# Altium PCB PicoBerry_V1.0_WithoutCM4.PcbDoc
Units mm, origin at the board's own origin, x right, y up, seen from the top; angles counter-clockwise.
Board outline 70 x 20 mm, 2 copper layers (L1 [TOP], L2 [BOT]), stack 1.57 mm thick; 35 components, 42 nets, 212 pads, 119 vias.
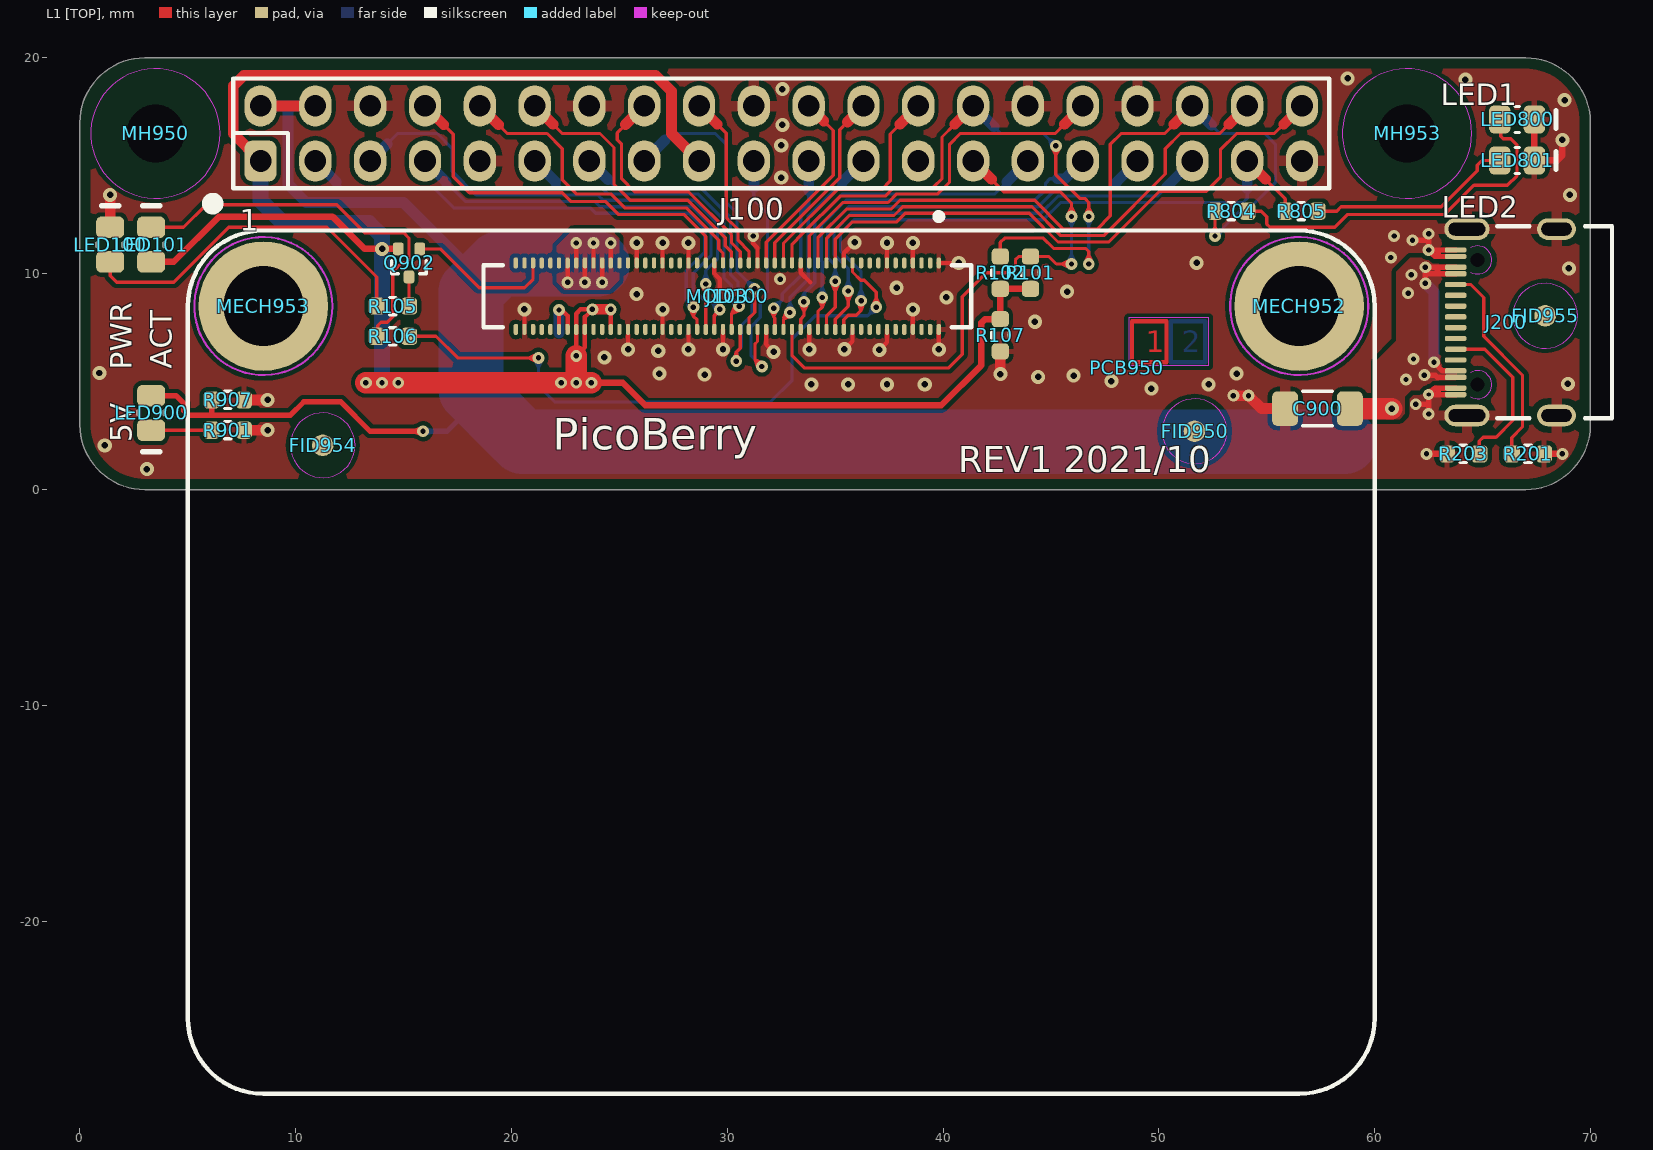
[diagram p0: L1 [TOP] view]
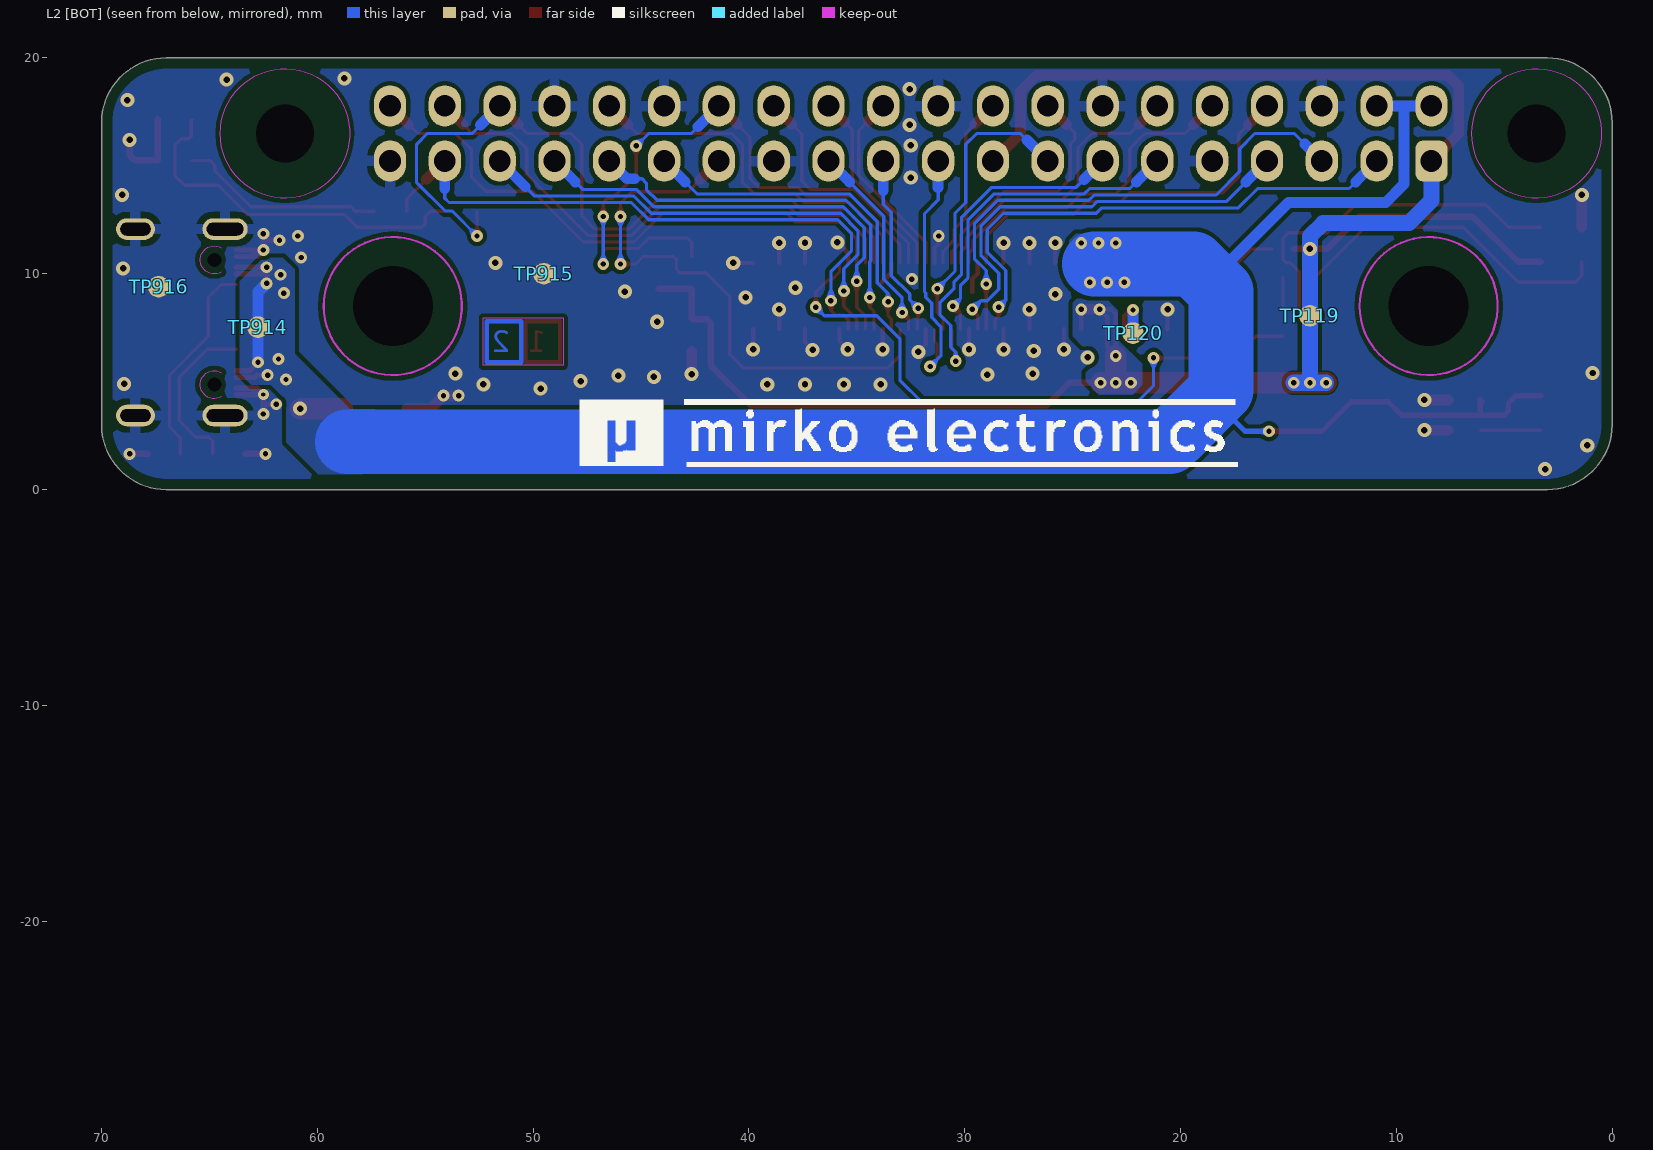
[diagram p1: L2 [BOT] view, seen from below]
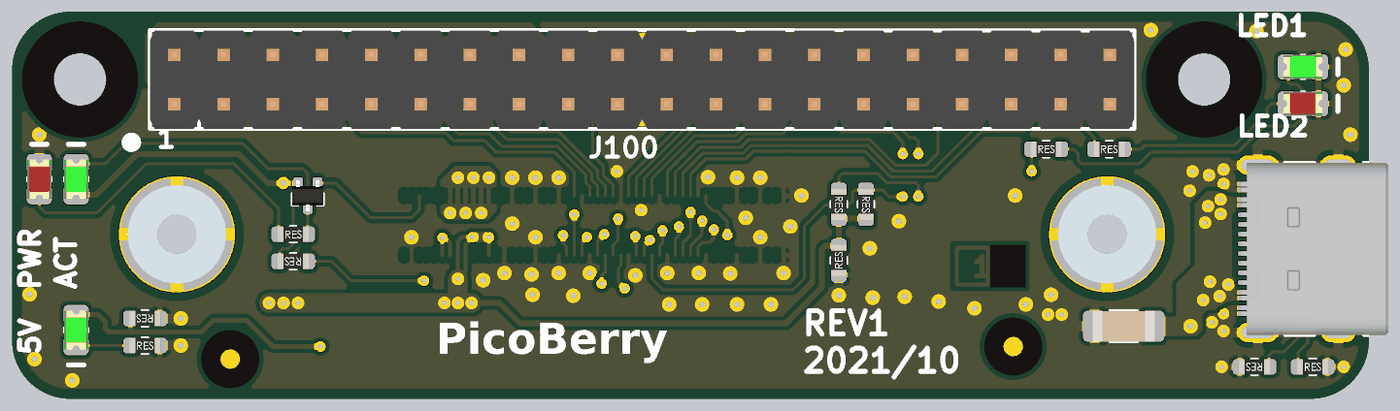
[diagram p2: 3D render of the assembled board from above, using the file's embedded part models]

## Layer stack, top to bottom
Solder [TOP]: solder mask 0.01, Solder Resist, Dk 3.5
L1 [TOP]: signal copper 0.035
Core: dielectric 1.5, FR-4, Dk 4.05
L2 [BOT]: signal copper 0.035
Solder [BOT]: solder mask 0.01, Solder Resist, Dk 3.5

## Board outline
0,3 0,17 cw(c3,17) 3,20 67,20 cw(c67,17) 70,17 70,3 cw(c67,3) 67,0 3,0 cw(c3,3)

## Design rules (kind name [scope] priority, off if disabled: settings)
BoardOutlineClearance BoardOutlineClearance_Components [InComponentClass('ComponentsNearEdge')] p1: gap=0 ignorepadtopadclearanceinfootprint=FALSE
BoardOutlineClearance BoardOutlineClearance_Silk [IsText] p2: gap=0 ignorepadtopadclearanceinfootprint=FALSE
BoardOutlineClearance [All] p3: gap=0.5 ignorepadtopadclearanceinfootprint=FALSE
Clearance Clearance_PCB950 [InComponent('PCB950') vs InComponent('PCB950')] p1: gap=0 ignorepadtopadclearanceinfootprint=FALSE
Clearance Clearance_polygon [InPolygon] p2: gap=0.2 ignorepadtopadclearanceinfootprint=FALSE
Clearance [All] p3: gap=0.15 ignorepadtopadclearanceinfootprint=FALSE
HoleSize [All] p1: absolutevalues=TRUE maxlimit=5 minlimit=0.2 maxpercent=80.000 minpercent=20.000
HoleToHoleClearance [All] p1: gap=0.4 allowstackedmicrovias=TRUE
MatchedLengths MatchedLengths_DiffPair [InDifferentialPairClass('All Differential Pairs')] p1: tolerance=0.1 checknetsindiffpair=TRUE checkdiffpairvsdiffpair=FALSE checkxsignals=FALSE checkothers=FALSE
MatchedLengths MatchedLengths_HDMI0 [InDifferentialPairClass('HDMI0')] p2: tolerance=1 checknetsindiffpair=FALSE checkdiffpairvsdiffpair=TRUE checkxsignals=TRUE checkothers=TRUE
MatchedLengths MatchedLengths_HDMI1 [InDifferentialPairClass('HDMI1')] p3: tolerance=1 checknetsindiffpair=FALSE checkdiffpairvsdiffpair=TRUE checkxsignals=TRUE checkothers=TRUE
MatchedLengths MatchedLengths_MIPI_CAM0 [InDifferentialPairClass('MIPI_CAM0')] p4: tolerance=1 checknetsindiffpair=FALSE checkdiffpairvsdiffpair=TRUE checkxsignals=TRUE checkothers=TRUE // CAM
MatchedLengths MatchedLengths_MIPI_CAM1 [InDifferentialPairClass('MIPI_CAM1')] p5: tolerance=1 checknetsindiffpair=FALSE checkdiffpairvsdiffpair=TRUE checkxsignals=TRUE checkothers=TRUE // CAM
MatchedLengths MatchedLengths_MIPI_DSI0 [InDifferentialPairClass('MIPI_DSI0')] p6: tolerance=1 checknetsindiffpair=FALSE checkdiffpairvsdiffpair=TRUE checkxsignals=TRUE checkothers=TRUE // CAM
MatchedLengths MatchedLengths_MIPI_DSI1 [InDifferentialPairClass('MIPI_DSI1')] p7: tolerance=1 checknetsindiffpair=FALSE checkdiffpairvsdiffpair=TRUE checkxsignals=TRUE checkothers=TRUE // CAM
MatchedLengths MatchedLengths_PCIe [InDifferentialPairClass('PCIe')] p8: tolerance=1 checknetsindiffpair=FALSE checkdiffpairvsdiffpair=TRUE checkxsignals=TRUE checkothers=TRUE // CAM
MinimumAnnularRing [All] p1: minimumring=0.1
MinimumSolderMaskSliver [All] p1: minsoldermaskwidth=0.05
PlaneClearance [All] p1: clearance=0.5
PlaneConnect [All] p1: planeconnectstyle=Relief reliefexpansion=0.5 reliefentries=4 reliefconductorwidth=0.5 reliefairgap=0.3
PolygonConnect PolygonConnect_via [IsVia] p1: connectstyle=Direct reliefconductorwidth=0.254 reliefentries=4 polygonreliefangle="90 Angle" airgapwidth=0.254
PolygonConnect [All] p2: thpad.connectstyle=Relief thpad.reliefconductorwidth=0.5 thpad.reliefentries=4 thpad.polygonreliefangle="90 Angle" thpad.airgapwidth=0.3 smdpad.connectstyle=Relief smdpad.reliefconductorwidth=0.25 smdpad.reliefentries=4 smdpad.polygonreliefangle="90 Angle" smdpad.airgapwidth=0.2 via.connectstyle=Direct via.reliefconductorwidth=0.2 via.reliefentries=4 via.polygonreliefangle="90 Angle" via.airgapwidth=0.3
RoutingVias [All] p1: holewidth=0.3 width=0.65 viastyle="Through Hole" minholewidth=0.2 minwidth=0.45 maxholewidth=0.4 maxwidth=0.8
SilkToSilkClearance [All] p1: silktosilkclearance=0.15
SilkToSolderMaskClearance [IsPad] p1: minsilkscreentomaskgap=0.1 clearancetoexposedcopper=TRUE
SolderMaskExpansion SolderMaskExpansion_via [IsVia] p1: expansion=-10 istentingtop=FALSE
SolderMaskExpansion [All] p2: expansion=0.05 istentingtop=FALSE
Width [All] p1: maxlimit=4 minlimit=0.1 preferedwidth=0.2
23 further rules are at their usual default settings.

## Classes and differential pairs
component class ComponentsNearEdge: J200 MOD100

## Components (designator, comment, footprint, x,y, rotation, side; value= is the part's Value field where it differs from the comment)
C900 "100uF/6V3" CAP_1206_R 57.35,3.75 r0 top
FID950 "Fiducial" PCB_FID_RND_100x300 51.65,2.7 r90 top
FID954 "Fiducial" PCB_FID_RND_100x300 11.25,2.05 r0 top
FID955 "Fiducial" PCB_FID_RND_100x300 67.9,8.05 r0 top
J100 "40pin (2x20pin)" CON_HDR_P254_2X20M_STR 32.5,16.5 r0 top locked
J103 "Mezzanine, 100pin, 3.0mm" PCB_BLANK_COMP_SMD 30,8.95 r0 top locked
J200 "U262-161N-4BVC11" CON_XKB_U262-161N-4BVC11 67.35,7.75 r90 top locked
LED100 "Red" LED_0805_RED_R 1.4,11.35 r270 top
LED101 "Green" LED_0805_GRN_R 3.3,11.35 r270 top
LED800 "Green" LED_0805_GRN_R 66.6,17.15 r180 top
LED801 "Red" LED_0805_RED_R 66.6,15.25 r180 top
LED900 "Green" LED_0805_GRN_R 3.3,3.55 r90 top
MECH952 "M2.5, L = 3.0mm" PCB_WRT_9774030151 56.5,8.5 r180 top locked value="M2.5, L = 3.0mm"
MECH953 "M2.5, L = 3.0mm" PCB_WRT_9774030151 8.5,8.5 r180 top locked value="M2.5, L = 3.0mm"
MH950 "H270_C600" PCB_MH_H270_C600 3.5,16.5 r90 top locked
MH953 "H270_C600" PCB_MH_H270_C600 61.5,16.5 r90 top locked
MOD100 "RPi CM4 Module" MOD_RPI_CM4_P40_C300_CON1 32.5,-8 r90 top locked
PCB950 "PCB_LAYER_STACKUP" PCB_STACKUP-2L_A1 48.5,5.65 r0 top
Q902 "DTA143ZE" PKG_SOT523_SC75_SOT416_P100_R 15.25,10.5 r180 top
R101 "2k" RES_0603_R 44.05,10.05 r270 top
R102 "2k" RES_0603_R 42.65,10.05 r270 top
R105 "2k" RES_0603_R 14.5,8.5 r0 top
R106 "15k" RES_0603_R 14.5,7.1 r180 top
R107 "2k" RES_0603_R 42.65,7.15 r90 top
R201 "5k1" RES_0603_R 67.1,1.65 r0 top
R203 "5k1" RES_0603_R 64.1,1.65 r180 top
R804 "15k" RES_0603_R 53.35,12.9 r0 top
R805 "2k" RES_0603_R 56.6,12.9 r0 top
R901 "15k" RES_0603_R 6.85,2.75 r0 top
R907 "2k" RES_0603_R 6.85,4.15 r180 top
TP119 "ICT" PCB_TP_ICT_100 14,8.05 r180 bottom
TP120 "ICT" PCB_TP_ICT_100 22.2,7.25 r180 bottom
TP914 "ICT" PCB_TP_ICT_100 62.75,7.525 r180 bottom
TP915 "ICT" PCB_TP_ICT_100 49.5,10 r180 bottom
TP916 "ICT" PCB_TP_ICT_100 67.35,9.4 r180 bottom

## Footprints (in the part's own frame and the unit in brackets; to place one, negate y for a bottom-side part, rotate by r counter-clockwise, add the part's x,y. Pads: shape width x height; smd on the part's side, far side on the other; paste and mask are expansions set on the pad)
CAP_1206_R [mm]
  rrect40% 1.2x1.6 smd paste+0: 1(-1.5,0)
  rrect40% 1.2x1.6 smd: 2(1.5,0)
  silkscreen extent -0.7,-0.8 0.7,0.8, body extent -1.6,-0.8 1.6,0.8, height 0.79
CON_HDR_P254_2X20M_STR [mm]
  rrect50% 1.5x1.9 hole 1: 1(-24.13,-1.275)
  oval 1.5x1.9 hole 1: 2(-24.13,1.275) 3(-21.59,-1.275) 4(-21.59,1.275) 5(-19.05,-1.275) 6(-19.05,1.275) 7(-16.51,-1.275) 8(-16.51,1.275) 9(-13.97,-1.275) 10(-13.97,1.275) 11(-11.43,-1.275) 12(-11.43,1.275) 13(-8.89,-1.275) 14(-8.89,1.275) 15(-6.35,-1.275) 16(-6.35,1.275) 17(-3.81,-1.275) 18(-3.81,1.275) 19(-1.27,-1.275) 20(-1.27,1.275) 21(1.27,-1.275) 22(1.27,1.275) 23(3.81,-1.275) 24(3.81,1.275) 25(6.35,-1.275) 26(6.35,1.275) 27(8.89,-1.275) 28(8.89,1.275) 29(11.43,-1.275) 30(11.43,1.275) 31(13.97,-1.275) 32(13.97,1.275) 33(16.51,-1.275) 34(16.51,1.275) 35(19.05,-1.275) 36(19.05,1.275) 37(21.59,-1.275) 38(21.59,1.275) 39(24.13,-1.275) 40(24.13,1.275)
  silkscreen extent -26.6,-3.5 25.4,2.55, body extent -25.4,-2.54 25.4,2.54, height 8.59
CON_XKB_U262-161N-4BVC11 [mm]
  rrect75% 0.25x1 smd: A1(-3.35,3.6) A4(-2.55,3.6) A5(-1.25,3.6) A6(-0.25,3.6) A7(0.25,3.6) A8(1.25,3.6) A9(2.55,3.6) A12(3.35,3.6) B1(3.05,3.6) B4(2.25,3.6) B5(1.75,3.6) B6(0.75,3.6) B7(-0.75,3.6) B8(-1.75,3.6) B9(-2.25,3.6) B12(-3.05,3.6)
  round 0 hole 0.65 unplated mask+0.1: MH1(-2.89,2.575) MH2(2.89,2.575)
  rrect100% 1x1.8 hole 1.4 slot 0.6 at 0 deg: SH(-4.32,-1.075) SH(4.32,-1.075)
  rrect100% 1x2.1 hole 1.7 slot 0.6 at 0 deg: SH(-4.32,3.075) SH(4.32,3.075)
  silkscreen extent -4.45,-3.65 4.45,1.67, body extent -4.45,-3.66 4.45,3.9, height 3.3
LED_0805_GRN_R [mm]
  rrect50% 1x1.3 smd: 1(-0.8,0) 2(0.8,0)
  silkscreen extent -1.8,-0.6 0.1,0.6, body extent -1.01,-0.63 1.01,0.62, height 1.1
LED_0805_RED_R [mm]
  rrect50% 1x1.3 smd: 1(-0.8,0) 2(0.8,0)
  silkscreen extent -1.8,-0.6 0.1,0.6, body extent -1.01,-0.63 1.01,0.62, height 1.1
MOD_RPI_CM4_P40_C300_CON1 [mm]
  rrect75% 0.5x0.2 smd: 1(18.5,-7.3) 2(15.42,-7.3) 3(18.5,-6.9) 4(15.42,-6.9) 5(18.5,-6.5) 6(15.42,-6.5) 7(18.5,-6.1) 8(15.42,-6.1) 9(18.5,-5.7) 10(15.42,-5.7) 11(18.5,-5.3) 12(15.42,-5.3) 13(18.5,-4.9) 14(15.42,-4.9) 15(18.5,-4.5) 16(15.42,-4.5) 17(18.5,-4.1) 18(15.42,-4.1) 19(18.5,-3.7) 20(15.42,-3.7) 21(18.5,-3.3) 22(15.42,-3.3) 23(18.5,-2.9) 24(15.42,-2.9) 25(18.5,-2.5) 26(15.42,-2.5) 27(18.5,-2.1) 28(15.42,-2.1) 29(18.5,-1.7) 30(15.42,-1.7) 31(18.5,-1.3) 32(15.42,-1.3) 33(18.5,-0.9) 34(15.42,-0.9) 35(18.5,-0.5) 36(15.42,-0.5) 37(18.5,-0.1) 38(15.42,-0.1) 39(18.5,0.3) 40(15.42,0.3) 41(18.5,0.7) 42(15.42,0.7) 43(18.5,1.1) 44(15.42,1.1) 45(18.5,1.5) 46(15.42,1.5) 47(18.5,1.9) 48(15.42,1.9) 49(18.5,2.3) 50(15.42,2.3) 51(18.5,2.7) 52(15.42,2.7) 53(18.5,3.1) 54(15.42,3.1) 55(18.5,3.5) 56(15.42,3.5) 57(18.5,3.9) 58(15.42,3.9) 59(18.5,4.3) 60(15.42,4.3) 61(18.5,4.7) 62(15.42,4.7) 63(18.5,5.1) 64(15.42,5.1) 65(18.5,5.5) 66(15.42,5.5) 67(18.5,5.9) 68(15.42,5.9) 69(18.5,6.3) 70(15.42,6.3) 71(18.5,6.7) 72(15.42,6.7) 73(18.5,7.1) 74(15.42,7.1) 75(18.5,7.5) 76(15.42,7.5) 77(18.5,7.9) 78(15.42,7.9) 79(18.5,8.3) 80(15.42,8.3) 81(18.5,8.7) 82(15.42,8.7) 83(18.5,9.1) 84(15.42,9.1) 85(18.5,9.5) 86(15.42,9.5) 87(18.5,9.9) 88(15.42,9.9) 89(18.5,10.3) 90(15.42,10.3) 91(18.5,10.7) 92(15.42,10.7) 93(18.5,11.1) 94(15.42,11.1) 95(18.5,11.5) 96(15.42,11.5) 97(18.5,11.9) 98(15.42,11.9) 99(18.5,12.3) 100(15.42,12.3)
  silkscreen extent -20,-27.5 20.8,27.5, body extent 15.27,-8.8 18.65,13.8, height 2.9
PCB_BLANK_COMP_SMD [mm]
  round 0.1 on Mech16: SMD(0,0)
PCB_FID_RND_100x300 [mm]
  round 1 smd paste-10 mask+1: 0(0,0)
  L1 [TOP] pour cut-out: -1.6,0 -1.478,-0.612 -1.131,-1.131 -0.612,-1.478 0,-1.6 0,-1.6 0.612,-1.478 1.131,-1.131 1.478,-0.612 1.6,0 1.6,0 1.478,0.612 1.131,1.131 0.612,1.478 0,1.6 0,1.6 -0.612,1.478 -1.131,1.131 -1.478,0.612 -1.6,0
  L1 [TOP] keep-out circle w0.05: c0,0 r1.5
PCB_MH_H270_C600 [mm]
  round 0 hole 2.7 unplated mask+3: 0(0,0)
  Keep-Out Layer circle w0.05: c0,0 r3
PCB_STACKUP-2L_A1 [mm]
  L1 [TOP] pour cut-out: 0,2.4 3.9,2.4 3.9,0 0,0
  L1 [TOP] lines w0.2: 0.25,0.25 1.85,0.25 1.85,2.15 0.25,2.15 0.25,0.25
  L2 [BOT] pour cut-out: 3.9,2.4 0,2.4 0,0 3.9,0
  L2 [BOT] lines w0.2: 2.05,0.25 3.65,0.25 3.65,2.15 2.05,2.15 2.05,0.25
  Keep-Out Layer region: 0.1,0.1 3.8,0.1 3.8,2.3 0.1,2.3
PCB_TP_ICT_100 [mm] "testpoint"
  round 1 smd paste-10: 1(0,0)
PCB_WRT_9774030151 [mm] "SMT Steel Spacer with internal Thread M2.5, height 3mm"
  round 6 / inner round 0 / far side round 0 hole 3.7 unplated: 1(0,0)
  body extent -2.55,-2.55 2.55,2.55, height 3
PKG_SOT523_SC75_SOT416_P100_R [mm]
  rrect50% 0.5x0.6 smd: 1(-0.5,-0.65) 2(0.5,-0.65) 3(0,0.65)
  silkscreen extent -0.8,-0.1 0.8,0.5, body extent -0.8,-0.79 0.8,0.81, height 0.79
RES_0603_R [mm]
  rrect50% 0.75x0.8 smd: 1(-0.75,0) 2(0.75,0)
  silkscreen extent -0.15,-0.4 0.15,0.4, body extent -0.8,-0.4 0.8,0.4, height 0.3

## Part data
C900: library part CAP-0025, "Capacitor; MLCC; GENERIC; TBD; TBD; TBD; TBD; SMD; 1206 (3216);", Manufacturer=GENERIC, Package (Case)="1206 (3216)", Component Subtype=MLCC, Component Type=Capacitor, Mounting Type=SMD, MPN=GENERIC, Supplier=?
FID950 FID954 FID955: library part PCB_FID_RND, "PCB Marking; Fiducial; Round;", Component Subtype=-, Component Type=Fiducial, Mounting Type=-, Supplier=?
J100: library part CON_2X20_ROW, "Connector; 2 Row;", Manufacturer=GENERIC, Component Subtype="Pin Header", Component Type=Connector, Mounting Type=THT, MPN=GENERIC, Supplier=?
J103: library part BOM_CON, "BOM list; Connector;", Manufacturer=Hirose, MPN=DF40HC(3.0)-100DS-0.4V, Package (Case)=SMD, Component Subtype=Microminiature, Component Type=Connector, Mounting Type=SMD, Supplier=?
J200: library part CON_USB_TYPE_C_16P, "Connector; USB 3.1 Type C; Receptacle; 24-pin; USB 2.0 Only;", Manufacturer="XKB Connectivity", Package (Case)=SMD, Component Subtype=USB-C, Component Type=Connector, Mounting Type=SMD, MPN=U262-161N-4BVC11, Supplier=?
LED100 LED801: library part DIO_LED_RED, "Diode; LED; Red;", Manufacturer="Foshan NationStar Optoelectronics", MPN=NCD0805R1, Package (Case)="0805 (2012)", Component Subtype="LED Diode", Component Type=LED, Mounting Type=SMD, Supplier=LCSC
LED101 LED800 LED900: library part DIO_LED_GRN, "Diode; LED; Green;", Manufacturer="Foshan NationStar Optoelectronics", MPN=NCD0805G1, Package (Case)="0805 (2012)", Component Subtype="LED Diode", Component Type=LED, Mounting Type=SMD, Supplier=LCSC
MECH952 MECH953: library part PCB_MECH_WRT_WA-SMSI, "PCB; Mechanical; SMT Steel Spacer; M2.5;", Manufacturer="Wurth Elektronik", MPN="977 403 015 1", Package (Case)=SMD, Component Subtype="SMD Spacer", Component Type="Spacer (Standoff)", Mounting Type=SMD, Supplier="Wurth Elektronik"
MH950 MH953: library part PCB_MECH_MH, "PCB Marking; Mounting hole;", Component Subtype=-, Component Type="Mounting Hole", Mounting Type=-, Supplier=?
MOD100: library part MOD_RPI_CM4_VAR3_CON1, "PCB Module; RPi Compute Module 4; Connector #1 (pins 1-100)", Manufacturer="Raspberry Pi Foundation", MPN="CM4 Module", Component Subtype="Raspberry Pi CM4", Component Type="PCB Module", Mounting Type=-, Supplier=?
Q902: library part TRA_BJT_PNP_DIG_ONS_DTA143ZE, "Transistor; BJT; PNP; Digital (Biased);", Manufacturer="On Semiconductor", MPN=DTA143ZET1G, Component Type=Transistor, Mounting Type=SMD
R101 R102 R105 R107 R805 R907: library part RES-0033, "Resistor; Thick Film; 2k2; 1%; 100mW; 100PPM; 75V; Standard; SMD; 0603 (1608);", Manufacturer="Yageo Corporation", MPN=TBD, Package (Case)="0603 (1608)", Component Subtype="Thick Film", Component Type=Resistor, Mounting Type=SMD, Supplier=?
R106 R804 R901: library part RES-0043, "Resistor; Thick Film; 15k; 1%; 100mW; 100PPM; 75V; Standard; SMD; 0603 (1608);", Manufacturer="Yageo Corporation", MPN=TBD, Package (Case)="0603 (1608)", Component Subtype="Thick Film", Component Type=Resistor, Mounting Type=SMD, Supplier=?
R201 R203: library part RES-0043, "Resistor; Thick Film; 5k1; 1%; 100mW; 100PPM; 75V; Standard; SMD; 0603 (1608);", Manufacturer="Yageo Corporation", MPN=TBD, Package (Case)="0603 (1608)", Component Subtype="Thick Film", Component Type=Resistor, Mounting Type=SMD, Supplier=?
TP119 TP120 TP914 TP915 TP916: library part PCB_TP_ICT, "Test Point (ICT)", Manufacturer=-, Component Type="Testpoint (for ICT)", Mounting Type="Non component", MPN=-, Specification="Testpoint (for ICT), SMD pad"
PCB950: Component Subtype=-, Component Type="PCB Marking", Mounting Type=-, Supplier=?

## Via types
v1: diameter 0.55, hole 0.25, L1 [TOP] to L2 [BOT], 60 vias
v2: diameter 0.65, hole 0.3, L1 [TOP] to L2 [BOT], 58 vias
v3: diameter 0.5, hole 0.2, L1 [TOP] to L2 [BOT], 1 vias

## Nets (pads, with @x,y where several pads share a name; then routed paths per layer and width w, separated by ;. In a path a pad name is that pad's centre, name@x,y a point inside that pad or via, vN(x,y) a via of type N, cw(c..) or ccw(c..) an arc to the next point about the centre after c; other vN are vias at no path point)
+1V8: MOD100.88 MOD100.90 TP120.1 | length 3.1
  L1 [TOP] w0.2: MOD100.90 v1(22.2,8.32) 22.33,8.32 22.6,8.05 MOD100.88
  L2 [BOT] w0.5: TP120.1 v1(22.2,8.32)
+3V3: J100.1 J100.17 LED101.2 MOD100.78 MOD100.84 MOD100.86 Q902.2 R101.2 R102.2 R107.2 TP119.1 | length 101.8
  L1 [TOP] w0.2: MOD100.78 v1(24.6,8.345) ; v1(23,6.195) 23.4,6.595 MOD100.84 23.4,8 v1(23.75,8.35) 23.2,8.35 23,8.15 MOD100.86 v1(23,6.195)
  L1 [TOP] w0.3: LED101.2 4.35,10.55 6.45,12.65 11.7,12.65 13.2,11.15 v2(14,11.15) Q902.2 ; v1(23.7,4.95) 25.15,4.95 26.2,3.9 39.919,3.9 41.771,5.752 41.771,7.721 41.95,7.9 R107.2 R102.2 R101.2 R101.2@44.189,9.3
  L1 [TOP] w0.5: J100.1 7.1,16.495 7.1,18.7 7.6,19.2 26.67,19.2 27.41,18.46 27.41,16.505 J100.17 ; v1(23.75,8.35) 24.595,8.35 v1(24.6,8.345)
  L1 [TOP] w1: v1(13.25,4.95) v1(22.3,4.95) v1(23,4.95) ; v1(23,6.195) v1(23,4.95) ; v1(23.7,4.95) v1(23,4.95)
  L2 [BOT] w0.75: J100.1 8.37,13.39 9.415,12.345 13.392,12.345 14,11.736 TP119.1 v1(14,4.95) ; v1(13.25,4.95) v1(14,4.95) ; v1(14.75,4.95) v1(14,4.95)
+5V: C900.2 J100.2 J100.4 J200.A4 J200.A9 J200.B4 J200.B9 LED900.2 MOD100.77 MOD100.79 MOD100.81 MOD100.83 MOD100.85 MOD100.87 R907.2 TP914.1 | length 108.7
  L1 [TOP] w0.2: v1(22.6,9.6) MOD100.87 ; MOD100.85 v1(23,11.425) v1@23,11.45 ; v1(23.4,9.6) MOD100.83 ; MOD100.81 v1(23.8,11.425) v1@23.8,11.45 ; v1(24.2,9.6) MOD100.79 ; MOD100.77 v1(24.6,11.425) v1@24.6,11.45
  L1 [TOP] w0.25: LED900.2 4.45,4.35 4.8,4 4.8,3.65 5,3.45 6.1,3.45 ; R907.2 6.1,3.45 ; v1(15.9,2.7) 13.45,2.7 12.088,4.062 10.371,4.062 9.759,3.45 6.1,3.45 ; v1(62.3,5.3) 62.8,5.3 62.9,5.2 J200.A4 ; v1(62.35,9.55) 62.35,9.925 ; v1(62.75,5.9) 63.15,5.5 J200.B9 ; 62.9,10 62.9,10.3 ; J200.B4 62.425,10 62.35,9.925 ; J200.A9 v1(62.35,10.3) 62.35,9.925
  L1 [TOP] w0.3: R907.2@6.05,4.1 R907.2
  L1 [TOP] w0.5: J100.2 J100.4
  L1 [TOP] w1: C900.2 v2(60.8,3.75)
  L2 [BOT] w0.25: v1(15.9,2.7) 17,2.7 18.126,3.826 18.126,4.599 ; 24.6,10.55 v1(24.6,11.425)
  L2 [BOT] w0.5: J100.2 9.64,17.775 ; J100.4 9.64,17.775 ; 18.45,9.85 14.996,13.304 10.491,13.304 9.64,14.155 9.64,17.775 ; v1(62.35,9.55) 62.75,9.15 v1(62.75,5.9)
  L2 [BOT] w3: 24,10.45 23.4,10.45 19.4,10.45 18.126,9.176 18.126,4.599 20.1,2.625 20.513,2.212 58.6,2.212
  other v1: 61.45,5.1 61.8,6.05 61.55,9.1 61.7,9.95
CM_GPIO2: J100.3 MOD100.58 | length 24.5
  L1 [TOP] w0.15: v1(28.425,8.45) 28.425,8.039 28.6,7.864 MOD100.58
  L2 [BOT] w0.15: 11.878,14.258 12.185,13.95 16.425,13.95 17.325,13.05 23.65,13.05 23.9,12.8 28.2,12.8 28.95,12.05 28.95,11 28.1,10.15 28.1,8.775 v1(28.425,8.45)
  L2 [BOT] w0.5: J100.3 11.878,14.258
CM_GPIO3: J100.5 MOD100.56 | length 24.1
  L1 [TOP] w0.15: MOD100.56 v1(29,9.525)
  L2 [BOT] w0.15: 14.238,16.013 14.725,16.5 16.55,16.5 17.25,15.8 17.25,14.75 18.35,13.65 24,13.65 24.25,13.4 28.474,13.4 29.55,12.324 29.55,10.7 29,10.15 v1(29,9.525)
  L2 [BOT] w0.5: J100.5 14.238,16.013
CM_GPIO4: J100.7 MOD100.54 | length 20.5
  L1 [TOP] w0.15: J100.7@15.99,15.19 J100.7 ; MOD100.54 29.4,8.062 29.65,8.312 v1(29.65,8.35)
  L2 [BOT] w0.15: 16.958,14.258 17.865,13.35 23.85,13.35 24.1,13.1 28.35,13.1 29.25,12.2 29.25,10.85 28.425,10.025 28.425,9.275 28.95,8.75 29.25,8.75 v1(29.65,8.35)
  L2 [BOT] w0.5: J100.7 16.958,14.258
CM_GPIO5: J100.29 MOD100.34 | length 16.3
  L1 [TOP] w0.15: MOD100.34 33.4,7.9 33.55,8.05 v1(33.55,8.7)
  L2 [BOT] w0.15: v1(33.55,8.7) 33.55,9.082 34.05,9.582 34.05,12.4 35.35,13.7 42.405,13.7 42.962,14.258
  L2 [BOT] w0.5: 42.962,14.258 J100.29
CM_GPIO6: J100.31 MOD100.30 | length 18.5
  L1 [TOP] w0.15: MOD100.30 34.2,8.25 34.4,8.45 v1(34.4,8.9)
  L2 [BOT] w0.15: v1(34.4,8.9) 34.4,10.55 34.35,10.6 34.35,12.25 35.5,13.4 44.25,13.4 44.75,13.9 44.75,14.2 44.95,14.4 45.3,14.4
  L2 [BOT] w0.5: 45.3,14.4 45.645,14.4 J100.31
CM_GPIO7: J100.26 MOD100.37 | length 11.1
  L1 [TOP] w0.15: MOD100.37 32.6,11.4 35.1,13.9 37.15,13.9 37.55,14.3 37.55,16.475 38.002,16.927
  L1 [TOP] w0.5: 38.002,16.927 J100.26
CM_GPIO8: J100.24 MOD100.39 | length 9
  L1 [TOP] w0.15: MOD100.39 32.2,11.437 32.763,12 35.215,14.452 35.215,16.68 35.567,17.032
  L1 [TOP] w0.5: 35.567,17.032 J100.24
CM_GPIO9: J100.21 MOD100.40 | length 8.5
  L1 [TOP] w0.15: v1(32.15,8.4) 32.15,8 32.2,7.95 MOD100.40
  L2 [BOT] w0.15: v1(32.15,8.4) 32.55,8.8 32.55,9.063 33.4,9.913 33.4,12.85 33.77,13.22 33.77,13.857
  L2 [BOT] w0.5: 33.77,13.857 J100.21
CM_GPIO10: J100.19 MOD100.44 | length 12.2
  L1 [TOP] w0.15: MOD100.44 31.4,6.861 31.28,6.74 31.28,6.02 v1(31.6,5.7)
  L2 [BOT] w0.15: 31.23,14 31.23,13.42 31.863,12.787 31.863,9.163 31.8,9.1 31.8,8.914 31.526,8.639 31.526,7.976 31.1,7.55 31.1,6.2 v1(31.6,5.7)
  L2 [BOT] w0.5: 31.23,14 J100.19
CM_GPIO11: J100.23 MOD100.38 | length 9.3
  L1 [TOP] w0.15: MOD100.38 32.6,7.905 v1(32.901,8.206)
  L2 [BOT] w0.15: v1(32.901,8.206) 32.901,8.649 32.9,8.65 32.9,8.889 33.75,9.739 33.75,12.665 35.342,14.258
  L2 [BOT] w0.5: 35.342,14.258 J100.23
CM_GPIO12: J100.32 MOD100.31 | length 17.4
  L1 [TOP] w0.15: MOD100.31 33.8,11.75 35.35,13.3 37.45,13.3 37.85,13.7 39.75,13.7 40.3,14.25 40.3,16 40.8,16.5 45.195,16.5 45.622,16.927
  L1 [TOP] w0.5: 45.622,16.927 J100.32
CM_GPIO13: J100.33 MOD100.28 | length 20.8
  L1 [TOP] w0.15: MOD100.28 34.6,8.05 35,8.45 v1(35,9.65)
  L2 [BOT] w0.15: v1@35,9.5 v1(35,9.65) 35,10.4 34.65,10.75 34.65,12.126 35.624,13.1 44.401,13.1 45.201,13.9 47.685,13.9 48.042,14.258
  L2 [BOT] w0.5: 48.042,14.258 J100.33
CM_GPIO14: J100.8 MOD100.55 | length 17.9
  L1 [TOP] w0.15: 16.857,16.908 17.3,16.465 17.3,14.5 18.05,13.75 22.35,13.75 22.75,13.35 24.35,13.35 24.95,12.75 27.977,12.75 29,11.727 MOD100.55
  L1 [TOP] w0.5: J100.8 16.857,16.908
CM_GPIO15: J100.10 MOD100.51 | length 15.6
  L1 [TOP] w0.15: 19.403,16.903 19.805,16.5 21.65,16.5 22.35,15.8 22.35,14.35 23,13.7 24.6,13.7 25.25,13.05 28.101,13.05 29.6,11.551 29.6,11.15 29.8,10.95 MOD100.51
  L1 [TOP] w0.5: J100.10 19.403,16.903
CM_GPIO16: J100.36 MOD100.29 R804.1 | length 35.4
  L1 [TOP] w0.125: v1(52.6,11.75) R804.1
  L1 [TOP] w0.15: MOD100.29 34.2,11.674 35.526,13 37.601,13 38.001,13.4 44.243,13.4 45.573,12.069 47.135,12.069 47.75,12.684 47.75,16 48.25,16.5 50.275,16.5 50.702,16.927
  L1 [TOP] w0.5: 50.702,16.927 J100.36
  L2 [BOT] w0.15: 52.438,16.887 52.825,16.5 54.9,16.5 55.4,16 55.4,14.226 54.08,12.906 53.756,12.906 v1(52.6,11.75)
  L2 [BOT] w0.5: J100.36 52.438,16.887
CM_GPIO17: J100.11 MOD100.50 | length 15.4
  L1 [TOP] w0.15: MOD100.50 30.2,8.15 v1(30.55,8.5)
  L2 [BOT] w0.15: 22.038,14.258 22.345,13.95 24.2,13.95 24.45,13.7 28.626,13.7 29.85,12.476 29.85,9.8 30.2,9.45 30.2,8.85 v1(30.55,8.5)
  L2 [BOT] w0.5: J100.11 22.038,14.258
CM_GPIO18: J100.12 MOD100.49 | length 13.7
  L1 [TOP] w0.15: 21.923,16.923 22.345,16.5 24.1,16.5 24.75,15.85 24.75,14.15 25.5,13.4 28.176,13.4 29.9,11.676 29.9,11.3 30.2,11 MOD100.49
  L1 [TOP] w0.5: J100.12 21.923,16.923
CM_GPIO19: J100.35 MOD100.26 | length 23
  L1 [TOP] w0.15: MOD100.26 35,7.9 35.6,8.5 v1(35.6,9.2)
  L2 [BOT] w0.15: v1(35.6,9.2) 35.6,10.224 34.95,10.874 34.95,12.001 35.749,12.8 44.526,12.8 45.326,13.6 49.925,13.6 50.36,14.035
  L2 [BOT] w0.5: 50.36,14.035 J100.35
CM_GPIO20: J100.38 MOD100.27 | length 25
  L1 [TOP] w0.15: MOD100.27 34.6,11.65 35.65,12.7 37.726,12.7 38.126,13.1 44.118,13.1 45.449,11.769 47.448,11.769 50.3,14.622 50.3,15.8 51,16.5 52.815,16.5 53.242,16.927
  L1 [TOP] w0.5: 53.242,16.927 J100.38
CM_GPIO21: J100.40 MOD100.25 | length 27.1
  L1 [TOP] w0.15: MOD100.25 35,11.6 35.8,12.4 37.85,12.4 38.25,12.8 43.994,12.8 45.325,11.469 47.676,11.469 50.027,13.82 52.2,13.82 52.85,14.47 52.85,15.75 53.6,16.5 55.355,16.5 55.782,16.927
  L1 [TOP] w0.5: 55.782,16.927 J100.40
CM_GPIO22: J100.15 MOD100.46 | length 13.8
  L1 [TOP] w0.15: MOD100.46 31,7.937 31.267,8.204 v1(31.267,9.307)
  L2 [BOT] w0.15: 27.118,16.193 27.425,16.5 29.45,16.5 29.95,16 29.95,13.3 30.45,12.8 30.45,10.124 v1(31.267,9.307)
  L2 [BOT] w0.5: J100.15 27.118,16.193
CM_GPIO23: J100.16 MOD100.47 | length 11.6
  L1 [TOP] w0.15: 25.287,16.912 24.9,16.525 24.9,16.2 25.1,16 25.1,14.4 25.7,13.8 28.2,13.8 30.2,11.8 30.2,11.426 30.6,11.026 MOD100.47
  L1 [TOP] w0.5: 25.287,16.912 J100.16
CM_GPIO24: J100.18 MOD100.45 | length 8.2
  L1 [TOP] w0.15: 29.538,16.927 29.95,16.515 29.95,12.6 30.5,12.05 30.5,11.55 31,11.05 MOD100.45
  L1 [TOP] w0.5: J100.18 29.538,16.927
CM_GPIO25: J100.22 MOD100.41 | length 9
  L1 [TOP] w0.15: MOD100.41 31.8,11.461 33.539,13.2 34.906,14.567 34.906,16.639 34.473,17.073
  L1 [TOP] w0.5: J100.22 34.473,17.073
CM_GPIO26: J100.37 MOD100.24 R805.1 | length 29.7
  L1 [TOP] w0.15: MOD100.24 35.4,7.876 35.599,8.075 35.975,8.075 36.2,8.3 v1(36.2,8.75) ; 54.938,14.377 55.85,13.465 R805.1
  L1 [TOP] w0.5: J100.37 54.938,14.377
  L2 [BOT] w0.15: v1(36.2,8.75) 36.2,10.1 35.25,11.05 35.25,11.877 35.873,12.5 44.65,12.5 45.45,13.3 53.897,13.3 54.09,13.493 54.09,13.95
  L2 [BOT] w0.5: 54.09,13.95 J100.37
CM_GPIO27: J100.13 MOD100.48 | length 16.5
  L1 [TOP] w0.15: v1(30.412,5.95) 30.412,6.362 30.6,6.55 MOD100.48
  L2 [BOT] w0.15: 24.468,14.367 24.835,14 28.75,14 30.15,12.6 30.15,9.95 30.5,9.6 30.5,9.3 31.15,8.65 31.15,8.1 30.65,7.6 30.65,6.6 30.412,6.362 v1(30.412,5.95)
  L2 [BOT] w0.5: J100.13 24.468,14.367
CM_ID_SC: J100.28 MOD100.35 R102.1 | length 29.6
  L1 [TOP] w0.15: MOD100.35 33,11.374 33.483,11.857 35.226,13.6 37.326,13.6 37.726,14 39.55,14 39.95,14.4 39.95,16.335 40.542,16.927 ; R102.1 42.65,11.45 42.85,11.65 44.65,11.65 45.131,11.169 46.611,11.169 46.75,11.03 v1(46.75,10.45) ; v1(45.225,15.925) 45.225,14.593 46.327,13.491 46.559,13.491 46.75,13.3 v1(46.75,12.65)
  L1 [TOP] w0.5: 40.542,16.927 J100.28
  L2 [BOT] w0.15: 42.358,16.808 42.665,16.5 44.65,16.5 v1(45.225,15.925) ; v1(46.75,10.45) v1(46.75,12.65)
  L2 [BOT] w0.5: J100.28 42.358,16.808
CM_ID_SD: J100.27 MOD100.36 R101.1 | length 26.7
  L1 [TOP] w0.15: MOD100.36 33,6.2 33.564,5.636 40.259,5.636 40.885,6.261 40.885,8.935 42,10.05 43.2,10.05 43.35,10.2 43.35,10.642 43.508,10.8 R101.1 44.899,10.8 45.249,10.45 v1(45.95,10.45) ; 42.238,14.377 42.815,13.8 45.426,13.8 45.95,13.276 v1(45.95,12.65)
  L1 [TOP] w0.5: J100.27 42.238,14.377
  L2 [BOT] w0.15: v1(45.95,10.45) v1(45.95,12.65)
CM_nACT: MOD100.21 R106.1 | length 29.2
  L1 [TOP] w0.15: R106.1 16.5,7.1 17.5,6.1 v1(21.25,6.1) ; MOD100.21 35.8,10.079 36.179,9.7 36.35,9.7 36.65,9.4 36.9,9.15 v1(36.9,8.45)
  L2 [BOT] w0.15: v1(21.25,6.1) 21.25,4.8 21.995,4.055 31.987,4.055 33,5.068 33,6.98 34.071,8.051 36.501,8.051 v1(36.9,8.45)
CM_nPWR: MOD100.95 Q902.1 | length 6.9
  L1 [TOP] w0.15: Q902.1 16.7,11.15 18.5,9.35 20.6,9.35 21,9.75 MOD100.95
GND: C900.1 J100.6 J100.9 J100.14 J100.20 J100.25 J100.30 J100.34 J100.39 J200.A1 J200.A12 J200.B1 J200.B12 J200.SH LED100.1 LED800.1 LED801.1 MOD100.1 MOD100.2 MOD100.7 MOD100.8 MOD100.13 MOD100.14 MOD100.22 MOD100.23 MOD100.32 MOD100.33 MOD100.42 MOD100.43 MOD100.52 MOD100.53 MOD100.59 MOD100.60 MOD100.65 MOD100.66 MOD100.71 MOD100.74 MOD100.98 R107.1 R201.2 R203.2 R901.2 R907.1 TP915.1 TP916.1 | length 43.8
  L1 [TOP] w0.2: MOD100.98 v2(20.6,8.345) v2@20.6,8.37 ; v2(25.4,6.495) MOD100.74 ; MOD100.71 v2(25.8,11.425) v2@25.8,11.45 ; MOD100.66 v2(27,8.345) ; MOD100.65 v2(27,11.425) v2@27,11.45 ; v2(28.2,6.495) MOD100.60 ; MOD100.59 v2(28.2,11.425) ; MOD100.53 29.4,10 29.65,9.75 29.65,9.15 ; v2@29.8,6.47 v2(29.8,6.495) MOD100.52 ; v1@31.232,11.718 v1(31.2,11.75) 31.2,11.4 31.4,11.2 MOD100.43 ; MOD100.42 31.8,6.725 v2(32.15,6.375) ; MOD100.33 33.4,10.05 33.85,9.6 ; v2@33.8,6.47 v2(33.8,6.495) MOD100.32 ; MOD100.23 35.4,10.95 v2(35.9,11.45) ; v2(35.425,6.5) 35.8,6.875 MOD100.22 ; v2(37.05,6.475) 37.4,6.825 MOD100.14 ; MOD100.13 v2(37.4,11.425) v2@37.4,11.45 ; MOD100.8 v2(38.6,8.345) v2@38.6,8.37 ; MOD100.7 v2(38.6,11.425) v2@38.6,11.45 ; v2@39.8,6.47 v2(39.8,6.495) MOD100.2 ; MOD100.1 v2(40.725,10.5) v2@40.75,10.5
  L1 [TOP] w0.25: v1(61.75,11.55) 62.5,11.55 ; v1(61.9,3.95) 62.5,3.95 ; v1(62.5,3.5) v3(62.5,4.4) 62.8,4.7 J200.B12 ; v3(62.5,4.4) J200.A1 ; v1(62.5,11.85) 62.5,11.55 ; 62.85,4.4 62.95,4.5 62.95,4.7 ; 62.85,11.1 62.95,11 62.95,10.8 ; J200.B1 62.8,10.8 v1(62.5,11.1) ; J200.A12 v1(62.5,11.1) ; v1(62.5,11.1) 62.5,11.55
  L1 [TOP] w0.3: v1(62.4,1.65) R203.2 ; LED800.1 LED801.1 68.45,15.25 68.7,15.5 v2(68.7,16.2) ; R201.2 v1(68.7,1.65)
  L1 [TOP] w0.5: LED100.1 v2(1.4,13.65) ; R901.2 v2(8.7,2.75) ; R907.1 v2(8.7,4.15) ; v2(42.65,5.35) R107.1 ; v1(53.45,4.35) v1(54.15,4.35) 54.75,3.75 C900.1
  other v1: 32.45,9.75 60.75,10.75 60.9,11.75
  other v2: 3.1,0.95 1.15,2.05 49.65,4.675 33.9,4.875 35.6,4.875 37.4,4.875 39.15,4.875 52.3,4.875 68.95,4.9 47.8,5.025 44.4,5.225 46.05,5.275 28.95,5.325 26.85,5.375 53.6,5.375 0.9,5.4 24.3,6.125 26.8,6.425 44.25,7.775 40.15,8.9 25.8,9.05 45.75,9.175 37.85,9.35 69,10.25 51.75,10.5 69.05,13.65 32.5,14.45 32.5,15.95 32.55,16.9 68.8,18.05 32.55,18.55 64.2,19 58.75,19.05
NetLED100_2: LED100.2 R105.1 | length 16.5
  L1 [TOP] w0.15: LED100.2 1.4,9.9 1.7,9.6 4.35,9.6 6.9,12.15 11.45,12.15 13.75,9.85 R105.1
NetLED101_1: LED101.1 R106.2 | length 18.5
  L1 [TOP] w0.15: LED101.1 4.8,12.15 5.85,13.2 11.9,13.2 13.2,11.9 15,11.9 15.25,11.65 15.25,10.653 15.111,10.514 14.914,10.514 14.5,10.1 14.5,8 14.25,7.75 13.95,7.75 13.8,7.6 13.8,7.15 R106.2
NetLED800_2: LED800.2 R804.2 | length 17.1
  L1 [TOP] w0.15: R804.2 54.75,12.9 55,12.65 55,12.3 55.15,12.15 58.15,12.15 58.75,12.75 63.25,12.75 64.6,14.1 66.15,14.1 66.6,14.55 66.6,15.95 66.3,16.25 65.95,16.25 65.837,16.363 65.837,17.113 LED800.2
NetLED801_2: LED801.2 R805.2 | length 9.6
  L1 [TOP] w0.15: R805.2 58.239,12.9 58.439,13.1 63.087,13.1 64.75,14.763 64.75,15.024 64.976,15.25 LED801.2
NetLED900_1: LED900.1 R901.1 | length 2.8
  L1 [TOP] w0.15: LED900.1 R901.1
NetQ902_3: Q902.3 R105.2 | length 1.3
  L1 [TOP] w0.15: R105.2 Q902.3
USB_CC1: J200.A5 R203.1 | length 7.7
  L1 [TOP] w0.15: J200.A5 65.1,6.5 66.4,5.2 66.4,3.2 65.625,2.425 65.025,2.425 64.85,2.25 R203.1
USB_CC2: J200.B5 R201.1 | length 9.8
  L1 [TOP] w0.15: J200.B5 64.45,9.5 65.05,8.9 65.05,7.1 66.85,5.3 66.85,2.9 66.35,2.4 R201.1
pads on no net: FID950.0 FID954.0 FID955.0 J103.SMD J200.A6 J200.A7 J200.A8 J200.B6 J200.B7 J200.B8 J200.MH1 J200.MH2 MECH952.1 MECH953.1 MH950.0 MH953.0 MOD100.3 MOD100.4 MOD100.5 MOD100.6 MOD100.9 MOD100.10 MOD100.11 MOD100.12 MOD100.15 MOD100.16 MOD100.17 MOD100.18 MOD100.19 MOD100.20 MOD100.57 MOD100.61 MOD100.62 MOD100.63 MOD100.64 MOD100.67 MOD100.68 MOD100.69 MOD100.70 MOD100.72 MOD100.73 MOD100.75 MOD100.76 MOD100.80 MOD100.82 MOD100.89 MOD100.91 MOD100.92 MOD100.93 MOD100.94 MOD100.96 MOD100.97 MOD100.99 MOD100.100

## Polygon pours and split planes (outlines as drawn)
GND on L1 [TOP] "L1_GND" (solid, remove dead copper, pour order 70): 0,20 70,20 70,0 0,0
+5V on L1 [TOP] "L1_+5V" (solid, remove dead copper, pour order 61): 24.6,12.05 25,11.65 25,9.7 24.55,9.25 22.45,9.25 22.1,9.6 22.1,11.3 22.85,12.05
+5V on L1 [TOP] "L1_+5V" (solid, remove dead copper, pour order 68): 62.45,10.75 62.65,10.55 64.25,10.55 64.4,10.4 64.4,9.85 64.3,9.75 63.2,9.75 62.95,9.5 62.95,6.3 63.1,6.15 63.1,5.9 63.25,5.75 64.3,5.75 64.4,5.65 64.4,5.05 64.25,4.9 62.45,4.9 62.15,4.6 61.7,4.6 61.4,4.3 61.4,3.5 61.15,3.25 60.55,3.25 60.05,3.75 60.05,5.95 61,6.9 61,10.1 61.65,10.75
GND on L2 [BOT] "L4_GND" (solid, remove dead copper, pour order 69): 0,20 70,20 70,0 0,0
+5V on L2 [BOT] "L2_+5V" (solid, remove dead copper, pour order 51): 62.5,10.75 63.6,9.65 63.6,5.4 63.05,4.85 62.15,4.85 61.45,4.15 61.45,2.2 59.95,0.7 57.9,0.7 57.35,1.25 57.35,3.7 58.45,3.7 61.05,6.3 61.05,10.2 61.6,10.75
+3V3 on L2 [BOT] "L4_+3V3" (solid, remove dead copper, pour order 67): 24.4,5.012 24.4,5.411 23.841,5.97 23.841,6.391 24.1,6.65 24.55,6.65 25,7.1 25,8.1 25,8.65 24.8,8.85 23.45,8.85 22.9,8.3 22.9,6.95 21.767,5.817 21.767,4.85 22.217,4.4 23.788,4.4
+5V on L2 [BOT] "L4_+5V" (solid, remove dead copper, pour order 49): 24.85,11.85 25.15,11.55 25.15,9.8 24.55,9.2 22.3,9.2 21.95,9.55 21.95,11.15 22.65,11.85

## Keep-outs
Keep-Out Layer:
  circle w0.1: c8.5,8.5 r3.2
  circle w0.1: c56.5,8.5 r3.2
  lines w0.05: 64.45,4.297 ccw(c64.775,4.86) 64.45,5.423 ; 64.45,10.077 ccw(c64.775,10.64) 64.45,11.203

## Silkscreen, mask and mechanical layers (free items; w line width, h text height)
Silk [TOP]:
  text "LED1" at 63.05,17.8 h1
  text "LED2" at 63.1,12.6 h1
  text "1" at 7.4,12 h1
  text "ACT" at 4.25,5.6 h1 r90
  text "PWR" at 2.4,5.55 h1 r90
  text "5V" at 2.4,2.2 h1 r90
  text "PicoBerry" at 21.9,1.35 h2.5
  text "REV1 2021/10" at 40.7,0.8 h1.2
Silk [BOT]:
  drawing of 21 lines, arcs and shapes, not listed
M01 BoardOutline:
  the board outline again, w0.1
M14 CADImport:
  circle w0.05: c41.39,17.77 r0.8
  circle w0.05: c41.39,15.23 r0.8
  circle w0.05: c26.15,15.23 r0.8
  circle w0.05: c26.15,17.77 r0.8
  circle w0.05: c3.5,16.5 r3
  circle w0.05: c3.5,-32.5 r3
  circle w0.05: c61.5,16.5 r3
  circle w0.05: c61.5,16.5 r1.35
  circle w0.05: c61.5,-32.5 r3
  circle w0.05: c61.5,-32.5 r1.35
  circle w0.05: c56.63,15.23 r0.8
  circle w0.05: c51.55,15.23 r0.8
  circle w0.05: c56.63,17.77 r0.8
  circle w0.05: c51.55,17.77 r0.8
  circle w0.05: c49.01,15.23 r0.8
  circle w0.05: c46.47,15.23 r0.8
  circle w0.05: c49.01,17.77 r0.8
  circle w0.05: c46.47,17.77 r0.8
  circle w0.05: c38.85,15.23 r0.8
  circle w0.05: c36.31,15.23 r0.8
  circle w0.05: c38.85,17.77 r0.8
  circle w0.05: c36.31,17.77 r0.8
  circle w0.05: c31.23,15.23 r0.8
  circle w0.05: c28.69,15.23 r0.8
  circle w0.05: c31.23,17.77 r0.8
  circle w0.05: c28.69,17.77 r0.8
  circle w0.05: c21.07,15.23 r0.8
  circle w0.05: c18.53,15.23 r0.8
  circle w0.05: c21.07,17.77 r0.8
  circle w0.05: c18.53,17.77 r0.8
  circle w0.05: c15.99,15.23 r0.8
  circle w0.05: c10.91,15.23 r0.8
  circle w0.05: c15.99,17.77 r0.8
  circle w0.05: c10.91,17.77 r0.8
  circle w0.05: c3.5,16.5 r1.35
  circle w0.05: c8.37,17.77 r0.8
  circle w0.05: c3.5,-32.5 r1.35
  circle w0.05: c54.09,15.23 r0.8
  circle w0.05: c54.09,17.77 r0.8
  circle w0.05: c43.93,15.23 r0.8
  circle w0.05: c43.93,17.77 r0.8
  circle w0.05: c33.77,15.23 r0.8
  circle w0.05: c33.77,17.77 r0.8
  circle w0.05: c23.61,15.23 r0.8
  circle w0.05: c23.61,17.77 r0.8
  circle w0.05: c13.45,15.23 r0.8
  circle w0.05: c13.45,17.77 r0.8
  lines w0.05: 3,-32.5 3.5,-32.5 ; 3,16.5 3.5,16.5 ; 3.5,-33 3.5,-32.5 ; 3.5,-32 3.5,-32.5 ; 3.5,16 3.5,16.5 ; 3.5,17 3.5,16.5 ; 4,-32.5 3.5,-32.5 ; 4,16.5 3.5,16.5 ; 31.5,-8 32.5,-8 ; 32,16.5 32.5,16.5 ; 32.5,-9 32.5,-8 ; 32.5,-7 32.5,-8 ; 32.5,16 32.5,16.5 ; 32.5,17 32.5,16.5 ; 33,16.5 32.5,16.5 ; 33.5,-8 32.5,-8 ; 61,-32.5 61.5,-32.5 ; 61,16.5 61.5,16.5 ; 61.5,-33 61.5,-32.5 ; 61.5,-32 61.5,-32.5 ; 61.5,16 61.5,16.5 ; 61.5,17 61.5,16.5 ; 62,-32.5 61.5,-32.5 ; 62,16.5 61.5,16.5 ; 0,-33 ccw(c3,-33) 3,-36 82,-36 ccw(c82,-33) 85,-33 85,17 ccw(c82,17) 82,20 3,20 ccw(c3,17) 0,17 0,-33 ; 7.1,14 57.9,14 57.9,19 7.1,19 7.1,14 ; 7.57,14.43 9.17,14.43 9.17,16.03 7.57,16.03 7.57,14.43
M19 AssemblySMDTop:
  text "SMD ASSEMBLY (TOP VIEW)" at 10,30 h5
M20 AssemblySMDBot:
  text "SMD ASSEMBLY (BOT VIEW)" at 80,25 h5
M21 AssemblyTHTTop:
  text "THT ASSEMBLY (TOP VIEW)" at 10,23 h5

## Dimensions
3,0 to 3,20 on M10 Dimensions
0,3 to 70,17 on M10 Dimensions

## Text inside footprints (layer, text, board x,y; h text height)
J200: M17 3DBodyTop "PCB Edge" at 72.15,5.55 h0.61 r90
PCB950: L2 [BOT] "2" at 51.05,6.35 h1; L1 [TOP] "1" at 49.4,6.35 h1